# Altium PCB 无线传感狗启.PcbDoc
Units mm, origin at the board's own origin, x right, y up, seen from the top; angles counter-clockwise.
Board outline 54.33 x 73.61 mm, 2 copper layers (Top Layer, Bottom Layer); 39 components, 38 nets, 122 pads, 60 vias.
Unrouted connection lines stored in the file: 3.
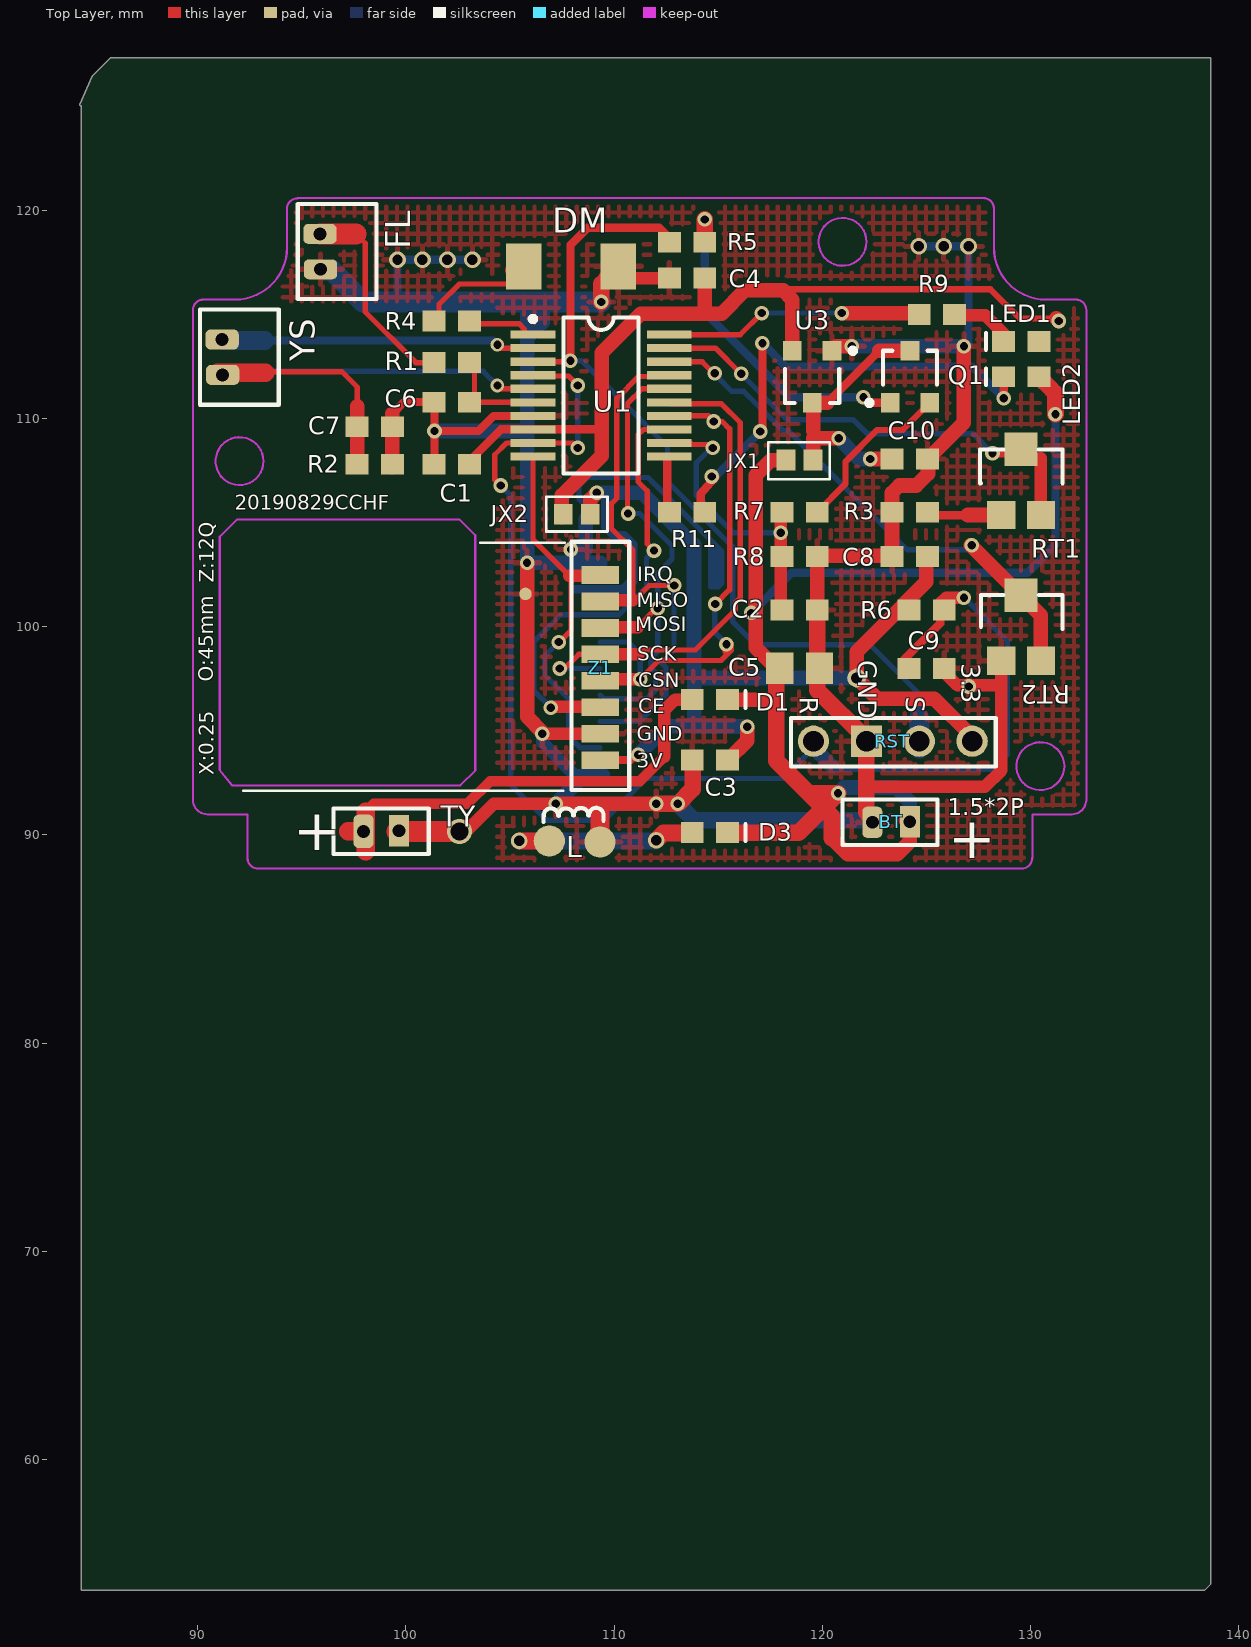
[diagram p0: Top Layer view]
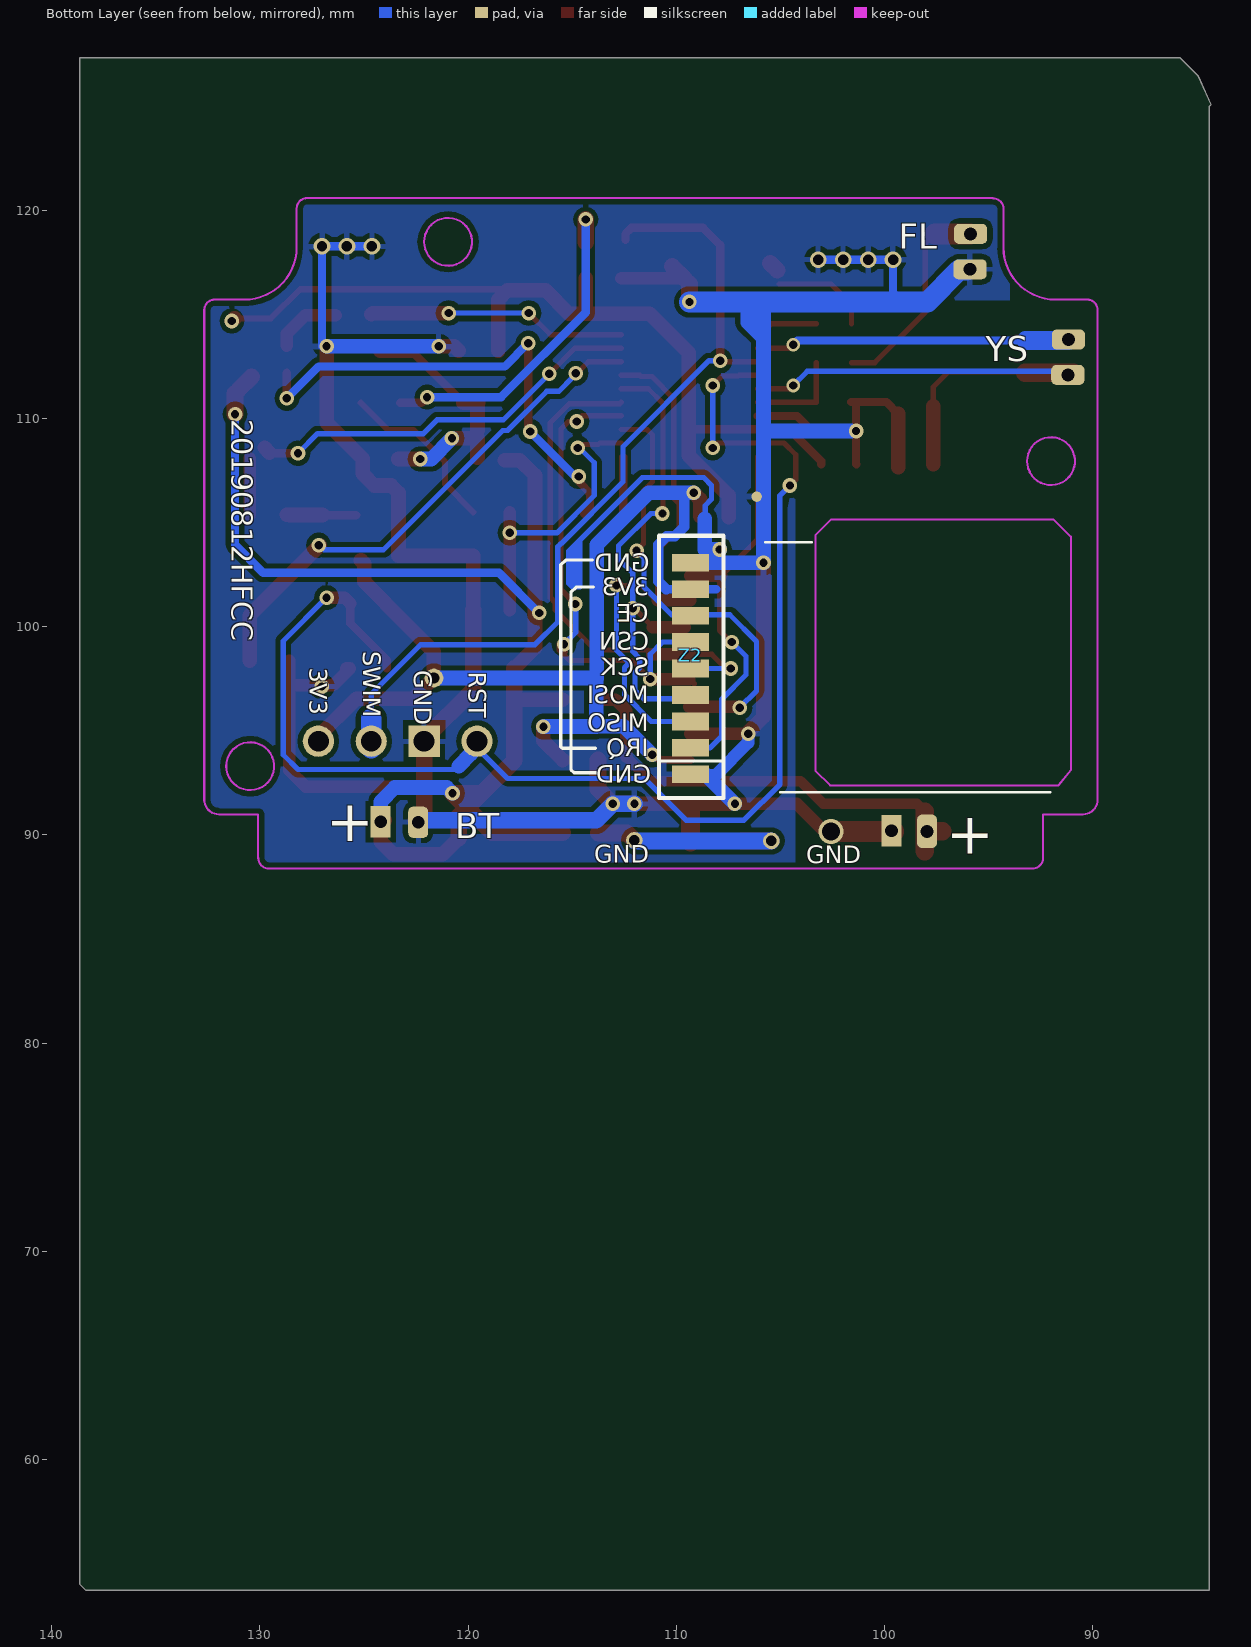
[diagram p1: Bottom Layer view, seen from below]

## Layer stack, top to bottom
Top Layer: signal copper 0.0356
Dielectric: dielectric 0.32, FR-4, Dk 4.8
Bottom Layer: signal copper 0.0356

## Board outline
84.328,125.07 84.404,124.993 84.404,53.721 138.354,53.721 138.659,54.026 138.659,127.33 85.827,127.33 84.938,126.441

## Design rules (kind name [scope] priority, off if disabled: settings)
Clearance [All] p1: gap=0.254
PolygonConnect [All] p1: connectstyle=Relief reliefconductorwidth=0.254 reliefentries=4 polygonreliefangle="90 Angle"
RoutingVias [All] p1: holewidth=0.711 width=1.27 viastyle="Through Hole" minholewidth=0.711 minwidth=1.27 maxholewidth=0.711 maxwidth=1.27
SilkscreenOverComponentPads [All] p1: minsilkscreentomaskgap=0.254
SolderMaskExpansion [All] p1: expansion=0.102
Width [All] p1: maxlimit=2 minlimit=0.254 preferedwidth=0.254 minimp=50.000000 maximp=50.000000 favimp=50.000000
27 further rules are at their usual default settings.

## Components (designator, comment, footprint, x,y, rotation, side; value= is the part's Value field where it differs from the comment)
BT "1.5*2P" MHDR1X2#1 123.932,90.635 r180 top
C1 "0.1uf" CR1608-0603 102.2,107.8 r180 top (schematic designator C6)
C2 "0.01uf" CR1608-0603 118.9,100.8 r180 top locked (schematic designator C12)
C3 "0.01uf" CR1608-0603 114.6,93.6 r0 top locked (schematic designator C10)
C4 "10uf" CR1608-0603 113.5,116.738 r180 top
C5 "22uf" CR2012-0805 118.9,98 r180 top locked (schematic designator R8)
C6 "0.01uf" CR1608-0603 102.2,110.782 r180 top locked
C7 "0.01uf" CR1608-0603 98.5,109.6 r0 top locked
C8 "0.1uf" CR1608-0603 124.2,103.378 r0 top
C9 "0.1uf" CR1608-0603 125,98 r180 top locked
C10 "10uf" CR1608-0603 124.2,108.052 r180 top (schematic designator C1)
D1 "SS14" CC1608-0603 114.6,96.5 r180 top (schematic designator D2)
D3 "SS14" CC1608-0603 114.6,90.113 r180 top (schematic designator D2)
DM "3*4*2小龟按键" HDR1X2 111.8,115.3 r0 top locked (schematic designator FW)
FL "1.5*2P" MHDR1X2#2 95.872,118.7 r270 top locked (schematic designator BT)
JX1 "0" CR1005-0402 118.9,108 r180 top locked (schematic designator C3)
JX2 "0" CR1005-0402 108.2,105.4 r180 top locked (schematic designator C3)
LED1 "LED-R" CC1608-0603 129.55,113.7 r0 top (schematic designator R1)
LED2 "LED-G" CC1608-0603 129.55,112 r0 top locked (schematic designator R1)
Q1 "S8050" SO-G3/C2.5#1 124.206,112 r0 top (schematic designator U3)
R1 "1K" CR1608-0603 102.2,112.682 r0 top locked
R2 "1M" CR1608-0603 98.5,107.8 r0 top locked
R3 "100K" CR1608-0603 124.2,105.5 r0 top
R4 "10K" CR1608-0603 102.2,114.681 r0 top locked
R5 "4.7K" CR1608-0603 113.5,118.466 r0 top
R6 "10K" CR1608-0603 125,100.8 r0 top locked (schematic designator R2)
R7 "180K" CR1608-0603 118.9,105.5 r0 top locked (schematic designator 7R)
R8 "360K" CR1608-0603 118.9,103.378 r180 top locked
R9 "1K" CR1608-0603 125.5,115 r0 top locked
R11 "470" CR1608-0603 113.5,105.5 r0 top locked (schematic designator R9)
RST "2.54*4" HDR1X4 119.572,94.5 r0 top locked (schematic designator Saoxie)
RT1 "50K" SO-G3/C2.5#2 129.54,107.264 r0 top locked (schematic designator U4)
RT2 "50K" SO-G3/C2.5#2 129.54,100.267 r0 top locked (schematic designator U4)
TY "1.5*2P" MHDR1X2#3 99.5,90.2 r180 top (schematic designator BT)
U1 "STM8L051F3P6" SSOP20 109.372,111.1 r270 top locked
U3 "XC6206 9v  6ua 250ma" SO-G3/C2.5#1 119.507,112 r180 top
YS "1.5*2P" MHDR1X2#2 91.172,113.63 r270 top locked (schematic designator BT)
Z1 "SI24R1" MHDR1X8 109.322,102.482 r270 top locked
Z2 "NRF24L01" MHDR1X8 109.322,94.182 r90 bottom locked

## Footprints (in the part's own frame and the unit in brackets; to place one, negate y for a bottom-side part, rotate by r counter-clockwise, add the part's x,y. Pads: shape width x height; smd on the part's side, far side on the other; paste and mask are expansions set on the pad)
CC1608-0603 [mm] "Chip Capacitor; Body 1.6 x 0.8 mm (LxW typ)"
  rect 1.1x1 smd: 1(-0.85,0) 2(0.85,0)
  silkscreen extent -1.7,-0.4 -1.7,0.4
CR1005-0402 [mm]
  rect 0.9x1 smd: 1(-0.65,0) 2(0.65,0)
CR1608-0603 [mm] "Chip Resistor; Body 1.6 x 0.8 mm (LxW typ)"
  rect 1.1x1 smd: 1(-0.85,0) 2(0.85,0)
CR2012-0805 [mm] "Chip Resistor; Body 2.0 x 1.3 mm (LxW typ)"
  rect 1.3x1.5 smd: 1(-0.95,0) 2(0.95,0)
HDR1X2 [mm]
  rect 1.7x2.2 smd: 1(-6.147,2.004) 2(-1.6,2.004)
HDR1X4 [mm] "Connector; Header; 4 Position"
  round 1.5 hole 1: 1(0,0) 3(5.08,0) 4(7.62,0)
  rect 1.5x1.5 hole 1: 2(2.54,0)
  silkscreen extent -1.08,-1.22 8.75,1.12
MHDR1X2#1 [mm]
  rect 0.96x1.5 hole 0.62: 1(-0.264,0)
  rrect50% 0.96x1.5 hole 0.62: 2(1.536,0.026)
  silkscreen extent -1.6,-1.07 2.97,1.12
MHDR1X2#2 [mm]
  rrect50% 0.96x1.6 hole 0.62: 1(-0.164,0) 2(1.536,0.026)
  silkscreen extent -1.6,-1.07 2.97,2.72
MHDR1X2#3 [mm]
  rect 0.96x1.5 hole 0.62: 1(-0.164,0)
  rrect50% 0.96x1.6 hole 0.62: 2(1.536,0.026)
  silkscreen extent -1.6,-1.07 2.97,1.12
MHDR1X8 [mm] "Connector; Header; 8 Position"
  rect 0.85x1.8 smd: 1(0,0) 2(1.27,0) 3(2.54,0) 4(3.81,0) 5(5.08,0) 6(6.35,0) 7(7.62,0) 8(8.89,0)
  silkscreen extent -1.6,-1.36 10.33,1.4
SO-G3/C2.5#1 [mm]
  rect 0.9x0.95 smd: 1(-0.95,-1.25) 2(0.95,-1.25) 3(0,1.25)
  silkscreen extent -2.07,-1.37 1.3,1.25
SO-G3/C2.5#2 [mm]
  rect 1.35x1.35 smd: 1(-0.95,-1.9) 2(0.95,-1.9)
  rect 1.6x1.6 smd: 3(0,1.25)
  silkscreen extent -1.96,-0.38 1.99,1.25
SSOP20 [mm] "SSOP, Plastic; 20 Leads; Body Width 5.3 mm; Pitch 0.65 mm"
  rect 0.39x2.15 smd: 1(-2.925,-3.275) 2(-2.275,-3.275) 3(-1.625,-3.275) 4(-0.975,-3.275) 5(-0.325,-3.275) 6(0.325,-3.275) 7(0.975,-3.275) 8(1.625,-3.275) 9(2.276,-3.275) 11(2.925,3.275) 13(1.625,3.275) 15(0.325,3.275) 16(-0.325,3.275) 17(-0.975,3.275) 18(-1.625,3.275) 19(-2.275,3.275) 20(-2.925,3.275)
  rect 0.395x2.15 smd: 10(2.925,-3.275) 12(2.276,3.275) 14(0.975,3.275)
  silkscreen extent -3.8,-3.4 3.75,1.8

## Part data
C1 C2 C5 C6 C8 C10 LED1 LED2 R2 R6 R7 R8: library part Res3, "Resistor"
C3 C4 C7 C9: library part "Cap Semi", "Capacitor (Semiconductor SIM Model)"
D1 D3 R1 R4: library part "Diode 1N4007", "1 Amp General Purpose Rectifier"
JX1 JX2: library part "Cap Semi", "Capacitor (Semiconductor SIM"
Q1 RT1 RT2 U3: library part QNPN, "NPN Bi"
R3 R5 R9 R11: library part "Cap Pol3"
RST: library part "Header 4", "Header, 4-Pin"
U1: library part ST6208CN6, "8-Bit ROM MCU with A/D Converter, Two Timers, Oscillator Safeguard and Safe Reset, 20-Pin SSOP, Industrial"

## Free pads (board coordinates)
  rect 1.8x0.85 smd far side: 0(109.322,92.912)
  round 0.8 hole 0.5: 1(105.435,89.713) 1(112.014,89.738)
  round 0.9 hole 0.55: 1(121.641,97.536)
  round 0.6 smd: 3(105.74,101.575)
  round 1.5 smd: 3(106.883,89.713) 3(109.322,89.662)
  round 0.5 smd far side: 4(106.147,106.248)

## Via types
v1: diameter 0.7, hole 0.4, Top Layer to Bottom Layer, 50 vias
v2: diameter 0.8, hole 0.5, Top Layer to Bottom Layer, 7 vias
v3: diameter 0.65, hole 0.4, Top Layer to Bottom Layer, 2 vias
v4: diameter 1.2, hole 0.86, Top Layer to Bottom Layer, 1 vias

## Nets (pads, with @x,y where several pads share a name; then routed paths per layer and width w, separated by ;. In a path a pad name is that pad's centre, name@x,y a point inside that pad or via, vN(x,y) a via of type N, cw(c..) or ccw(c..) an arc to the next point about the centre after c; other vN are vias at no path point)
3V3: C1.1 C3.2 C4.1 C8.2 JX2.1 JX2.2 LED1.2 pad.1@121.641,97.536 R6.1 RST.4 U1.8 U3.2 Z1.8 Z2.7 | length 102.7
  Top Layer w0.3: 117.983,116.205 128.067,116.205 129.468,114.804 v1@131.22,114.804
  Top Layer w0.4: C1.1 103.05,107.961 104.564,109.475 U1.8 109.398,109.475 109.474,109.475 ; U1.8@106.096,109.473 U1.8 ; Z1.8@109.322,93.599 110.795,93.599 111.049,93.853 v1(111.15,93.853)
  Top Layer w0.7: JX2.2@107.493,105.247 107.493,106.299 109.398,108.204 109.398,109.475 109.398,113.157 111.277,115.037 114.351,115.037 115.164,115.037 116.281,116.154 118.11,116.154 118.557,115.707 U3.2 ; JX2.1@108.85,105.308 108.85,106.107 v1(109.169,106.426) ; 114.35,115.037 C4.1 ; C3.2 116.383,94.533 v1(116.383,95.199) ; C8.2@125.146,103.188 124.993,103.036 124.993,102.159 123.952,101.117 123.952,101.102 121.641,98.791 121.641,97.536 122.631,96.545 125.374,96.545 127.192,94.728 RST.4@127.192,94.182 ; v1@131.22,114.804 v1(131.343,114.681)
  Bottom Layer w0.4: 108.078,101.802 110.491,101.802
  Bottom Layer w0.5: 109.626,106.451 109.626,104.8 110.084,104.343 110.465,104.343 110.871,103.937 110.871,102.182 110.491,101.802
  Bottom Layer w0.7: v1(109.169,106.426) 111.336,106.426 113.832,103.93 113.832,97.496 ; v1(111.15,93.853) 112.522,95.225 v1@116.357,95.225 ; v1(116.383,95.199) 113.843,95.199 113.843,97.536 pad.1@121.641,97.536
4.2V: 
5V: D1.2 TY.2 | length 21.9
  Top Layer w0.5: 98.069,91.11 98.45,91.491 102.946,91.491 104.038,92.583 111.227,92.583 112.395,93.751
  Top Layer w0.6: 112.395,93.751 112.395,95.97 112.925,96.5 D1.2
  Top Layer w0.9: 97.231,90.174 TY.2@98.064,90.174 ; 98.069,89.23 98.069,91.11
BT: BT.1 C5.2 C10.2 D1.1 D3.1 JX1.1 JX1.2 LED2.2 Q1.3 U3.3 | length 77.1
  Top Layer w0.4: 117.78,97.2 117.95,97.2 ; 120.224,110.75 122.724,113.25
  Top Layer w0.5: 117.768,96 117.78,96.012
  Top Layer w0.7: D1.1 117.68,96.5 ; C5.2@117.78,97.993 116.789,98.984 116.789,107.264 117.525,108 JX1.2 ; JX1.1@119.55,108.127 119.55,109.042 v1(120.777,109.042) ; 119.55,109.423 119.55,110.707 U3.3 120.224,110.75 ; 120.447,89.84 121.209,89.078 123.596,89.078 124.196,89.677 124.196,90.5 BT.1@123.996,90.7 ; v1(122.301,108.052) C10.2 ; 122.724,113.25 Q1.3
  Top Layer w0.8: D3.1 118.866,90.113 120.053,91.3 ; C5.2@117.78,97.993 117.78,97.2 117.78,96.012 117.78,93.574 119.355,91.999 ; 120.447,89.84 120.447,90.907 120.053,91.3 ; LED2.2 131.013,111.387 131.013,111.379 131.191,111.201 v1(131.191,110.2) ; 119.355,91.999 120.053,91.3 ; 119.355,91.999 v1(120.752,91.999) 120.053,91.3
  Bottom Layer w0.4: v1(116.586,100.66) 118.516,102.591 129.845,102.591 131.191,103.937 v1@131.191,110.007
  Bottom Layer w0.7: v1(120.752,91.999) 121.031,92.278 123.52,92.278 124.196,91.602 BT.1 ; v1(120.777,109.042) 121.768,108.052 v1@122.174,108.052
CE: U1.13 Z1.6 Z2.6 | length 21.7
  Top Layer w0.254: v1(111.912,103.657) 111.582,103.988 111.582,106.528 111.15,106.959 111.15,109.22 111.405,109.475 U1.13
  Top Layer w0.6: v1@107.01,96.164 Z1.6@109.372,96.164
  Bottom Layer w0.254: v1(106.959,96.114) 106.152,96.921 106.152,99.294 107.434,100.576 110.228,100.576 111.557,101.905 111.557,103.302 v1(111.912,103.657)
CSN: U1.14 Z1.5 Z2.5 | length 25.3
  Top Layer w0.254: Z1.5@109.144,97.257 Z1.5@109.372,97.485 ; v1(111.252,97.485) 112.141,98.374 115.138,98.374 115.621,98.857 v1@115.621,99.187 ; U1.14 114.513,110.124 v1(114.783,109.855) 115.189,109.855 115.545,109.499 115.545,101.778 v1(114.859,101.092) ; 115.322,98.781 115.322,99.091 v1(115.392,99.162)
  Top Layer w0.6: Z1.5@109.372,97.485 v1(111.252,97.485)
  Bottom Layer w0.254: Z2.5 110.669,99.262 111.252,98.679 v1(111.252,97.485) ; v1(114.859,101.092) 114.833,101.067 114.833,99.72 v1(115.392,99.162)
DM: DM.1 R4.1 | length 5.3
  Top Layer w0.254: R4.1@101.588,114.554 101.588,115.482 102.565,116.459 DM.1@105.054,116.459
  Top Layer w0.8: DM.1@105.156,117.12 DM.1@105.486,117.45
DM-D: R4.2 U1.1 | length 3.2
  Top Layer w0.254: R4.2@103.288,114.554 105.427,114.554 105.681,114.3 105.681,114.025 U1.1
DYKG: 
DYKZ: 
FL: C6.1 R1.2 U1.6 | length 4.7
  Top Layer w0.254: R1.2@103.288,112.682 103.288,110.774 U1.6
FL-IN: FL.1 R1.1 | length 10.1
  Top Layer w0.254: 97.695,118.764 98.044,118.415 98.044,115.113 100.475,112.682 R1.1@101.588,112.682
  Top Layer w1: FL.1 97.595,118.864
FL-RT: RT1.2 RT1.3 U1.19 | length 22.4
  Top Layer w0.254: U1.19@112.662,113.36 U1.19 114.87,113.375 v1(116.103,112.141)
  Top Layer w0.4: v1(128.168,108.331) 129.515,108.331 RT1.3@129.769,108.585
  Top Layer w0.6: RT1.2 130.49,108.092
  Top Layer w0.7: RT1.3@129.54,108.356 RT1.3@129.769,108.585
  Bottom Layer w0.254: v1(116.103,112.141) 118.313,109.931 121.488,109.931 122.149,109.271 127.229,109.271 v1(128.168,108.331)
GND: BT.2 C1.2 C2.1 C3.1 C4.2 C5.1 C6.2 C7.2 C8.1 C9.1 C10.1 DM.2 FL.2 pad.0 pad.3@105.74,101.575 pad.3@109.322,89.662 pad.4 R2.2 R3.1 R8.1 RST.2 RT2.1 TY.1 U1.7 U3.1 Z1.7 Z2.8 | length 195.2
  Top Layer w0.254: DM.2@109.372,116.476 DM.2@109.634,116.738
  Top Layer w0.39: 99.35,110.221 99.911,110.782 C6.2 C6.2@101.371,110.782 ; C1.2 101.371,107.821 v1(101.371,109.398) C6.2@101.371,110.782 ; v1@101.6,109.398 103.48,109.398 104.206,110.125 U1.7 ; C6.2@101.6,110.782 C6.2@101.371,110.782 ; 128.59,97.18 RT2.1
  Top Layer w0.6: v4(102.565,90.17) 102.895,90.17 104.216,91.491 109.398,91.491 109.245,91.338 ; v1@106.553,94.931 106.622,94.862 Z1.7 ; DM.2@109.634,116.738 C4.2 ; 122.352,92.304 127.787,92.304 128.59,93.106 RT2.1 ; C9.1@125.857,98 125.672,98 126.492,97.18 128.59,97.18
  Top Layer w0.7: R2.2@99.35,107.66 99.35,110.221 ; v1(105.816,103.072) 105.816,95.668 v1@106.553,94.931 ; v1(107.188,91.491) 109.398,91.491 v1(112.014,91.491) ; C2.1 R8.1 ; R8.1@119.75,103.415 123.342,103.415 123.342,106.426 123.698,106.782 124.511,106.782 125.07,107.34 125.07,108.071 126.797,109.798 v1(126.797,113.462) ; U3.1 120.669,113.462 v1(121.412,113.462)
  Top Layer w0.8: v1(109.372,115.595) DM.2@109.372,116.476 ; DM.2@109.634,116.738 DM.2 ; v1(112.014,91.491) v1(113.055,91.491) 113.767,92.202 C3.1@113.767,93.6 ; C2.1 119.75,96.963 122.112,94.601 122.112,91.088 BT.2@122.5,90.7
  Top Layer w0.9: pad.3@109.322,89.662 109.322,91.262
  Top Layer w1: TY.1@99.564,90.17 v4(102.565,90.17)
  Bottom Layer w0.254: 108.61,105.207 108.61,105.824 108.311,106.123 108.311,106.787 108.687,107.163 111.633,107.163 114.63,104.165 ; 115.138,102.286 115.164,102.311 ; 114.63,104.165 114.897,103.899 ; 114.63,104.165 114.63,101.905 114.986,101.905 115.164,102.083 115.164,102.311 ; 114.897,102.171 115.1,102.375 ; 114.897,102.171 114.808,102.083 114.808,103.683 114.656,103.835 114.656,101.93 114.833,101.93 114.897,101.994 114.897,102.171 ; 114.897,102.171 114.897,103.899 ; 114.897,103.899 115.164,103.632 ; 115.1,102.375 115.164,102.311 ; 115.1,102.375 114.986,102.489 114.986,103.454 115.164,103.632 ; 115.1,102.375 115.164,102.438 ; 115.164,102.311 115.164,102.438 ; 115.164,102.438 115.164,103.632
  Bottom Layer w0.4: 99.517,115.976 99.593,116.053 v2(99.593,117.627) v2(100.793,117.627) v2(101.993,117.627) v2(103.193,117.627) ; v2(124.619,118.262) v2(125.819,118.262) v2(127.019,118.262) v1@127.019,113.462
  Bottom Layer w0.5: FL.2@95.898,117.264 FL.2@96.04,117.122 ; TY.1@99.636,89.916 TY.1@99.636,89.941 ; 105.816,113.741 106.68,114.605 106.68,115.748 ; 105.816,115.265 cw(c105.51,114.959) 105.943,114.959 ; 105.943,115.265 105.943,114.3 106.375,114.732 106.375,115.341 ; 108.078,92.912 108.939,92.912 pad.0 pad.0@109.546,92.912
  Bottom Layer w0.6: v1(106.553,94.862) 106.553,94.437 108.078,92.912 ; pad.0@108.609,92.912 pad.0@108.939,92.912
  Bottom Layer w0.7: v1@101.6,109.398 105.791,109.398 ; 105.816,115.265 105.816,113.741 v1(105.816,103.072) Z2.8 ; v1(107.188,91.491) pad.0@108.609,92.912 ; v1(107.925,103.708) 108.636,103.708 108.636,105.181 ; v1(121.412,113.462) v1(126.797,113.462)
  Bottom Layer w0.8: v1(112.014,91.491) v1(113.055,91.491) 113.846,90.7 BT.2@122.496,90.7
  Bottom Layer w1: FL.2@96.04,117.122 96.419,117.122 97.946,115.595 v1(109.372,115.595)
  other v1: 127.025,97.13
IRQ: U1.10 Z1.1 Z2.1 | length 18.5
  Top Layer w0.254: U1.10 106.097,104.189 107.848,102.438 ; v1@107.353,99.251 107.925,99.822 107.925,102.159 108.204,102.438
  Top Layer w0.6: 107.848,102.438 Z1.1@109.322,102.438
  Bottom Layer w0.254: v1(107.34,99.263) 106.66,98.583 106.66,97.69 107.817,96.533 107.817,94.748 108.383,94.182 Z2.1
L+: 
L-: 
L-R-R: LED1.1 R9.2 | length 3.3
  Top Layer w0.6: R9.2@126.35,114.96 127.813,114.96 128.7,114.073 LED1.1@128.7,113.5
LED2: R11.1 U1.11 | length 2.6
  Top Layer w0.4: R11.1@112.547,105.551 U1.11@112.547,108.153
LED2-R: LED2.1 R11.2 | length 23.7
  Top Layer w0.4: R11.2@114.427,105.422 114.15,105.699 114.15,106.377 114.794,107.114 v1@114.859,107.188 ; v1@117.119,109.271 v1(117.018,109.372) 117.119,109.474 v1(117.119,113.614) ; LED2.1@128.7,112.2 128.702,112.198 v1(128.702,110.973)
  Bottom Layer w0.4: v1(114.681,107.213) 114.859,107.213 v1(117.018,109.372) ; v1(117.119,113.614) 118.237,112.497 127.178,112.497 v1(128.702,110.973)
MISO: U1.17 Z1.2 Z2.2 | length 26.4
  Top Layer w0.254: 110.896,101.27 110.896,103.683 109.861,104.719 109.861,105.898 110.129,106.166 110.129,110.967 111.175,112.014 111.699,112.014 111.76,112.075 U1.17 ; 110.973,101.27 111.684,101.981 v1(112.878,101.981)
  Top Layer w0.6: Z1.2@109.322,101.27 110.896,101.27
  Bottom Layer w0.254: Z2.2 111.208,95.452 112.491,96.735 112.491,98.036 112.278,98.249 112.278,98.267 112.878,98.867 v1(112.878,101.981) v1@112.725,101.981
MOSI: U1.16 Z1.3 Z2.3 | length 23.5
  Top Layer w0.254: v1@110.642,105.435 110.642,110.719 111.348,111.425 U1.16 ; 111.125,99.974 v1@112.065,100.914
  Top Layer w0.6: Z1.3@109.601,99.974 111.125,99.974
  Bottom Layer w0.254: Z2.3 109.498,96.545 111.583,96.545 111.983,96.946 111.983,97.802 111.776,98.009 111.787,98.02 111.787,98.022 111.77,98.039 111.77,98.182 111.76,98.192 111.76,98.475 112.09,98.806 112.09,102.565 112.776,103.251 112.776,103.886 111.227,105.435 v1(110.668,105.435)
  other v1: 112.09,100.889
PB7: C2.2 R7.1 R8.2 U1.12 | length 14.6
  Top Layer w0.254: U1.12 113.68,108.824 113.754,108.75 v1@114.808,108.75 ; v1@114.808,108.585 v1@114.808,108.737
  Top Layer w0.6: C2.2@117.997,100.8 R7.1@117.997,105.5
  Bottom Layer w0.254: v1@114.808,108.737 113.944,107.874 113.944,106.299 115.735,104.508 v1(117.996,104.508)
  other v1: 114.732,108.585
Q1-B: Q1.1 R5.2 | length 16.3
  Top Layer w0.254: R5.2 R5.2
  Top Layer w0.4: v1(121.971,111.023) 122.244,110.75 Q1.1
  Top Layer w0.8: R5.2 v1(114.351,119.558)
  Bottom Layer w0.4: v1(114.351,119.558) 114.351,115.087 118.415,111.023 v1(121.971,111.023)
Q1-E: Q1.2 R7.2 | length 8.2
  Top Layer w0.3: R7.2 121.107,106.857 121.107,107.924 122.632,109.449 123.855,109.449 Q1.2
Q4-B: 
R1R: R3.2 RT1.1 | length 3.3
  Top Layer w0.4: R3.2@125.374,105.359 126.975,105.359 126.98,105.364
  Top Layer w0.7: 126.98,105.364 RT1.1 ; RT1.1@128.572,105.382 RT1.1@128.704,105.382
R5: 
RST: C9.2 R6.2 RST.1 U1.4 U1.9 | length 66.2
  Top Layer w0.254: v1(104.546,106.782) 104.267,107.061 104.267,108.255 104.836,108.824 U1.9 108.016,108.824 v1(108.255,108.585) ; U1.4 106.985,112.075 107.02,112.039 107.798,112.039 v1(108.255,111.582)
  Top Layer w0.4: C9.2@123.901,98 123.901,98.4 125.654,100.152 R6.2@125.654,101.104
  Top Layer w0.6: R6.2@125.654,101.104 125.947,101.397 v1(126.797,101.397)
  Bottom Layer w0.254: v1(104.546,106.782) 105.029,106.299 105.029,92.431 106.75,90.71 109.531,90.71 111.531,92.71 118.1,92.71 119.572,94.182 RST.1@119.865,93.889 ; v1(108.255,108.585) v1(108.255,111.582) ; 120.452,93.302 120.612,93.142 128.168,93.142 128.877,93.85 128.877,99.317 v1(126.797,101.397) v1@126.594,101.397
  Bottom Layer w0.7: RST.1@119.865,93.889 120.452,93.302
RT2: RT2.2 RT2.3 U1.18 | length 25.3
  Top Layer w0.254: U1.18 114.224,112.725 v1@114.96,111.989 ; RT2.3@129.484,101.573 RT2.3
  Top Layer w0.7: v1@127.127,103.911 130.49,100.548 RT2.2
  Bottom Layer w0.254: v1@114.96,111.989 115.646,111.303 116.223,111.303 118.103,109.423 118.339,109.423 124.073,103.688 126.904,103.688 v1@127.127,103.911
  other v1: 127.178,103.911 114.833,112.166
SCK: U1.15 Z1.4 Z2.4 | length 24.4
  Top Layer w0.254: v1@107.493,97.866 108.299,98.672 Z1.4 ; 111.169,98.672 111.379,98.882 113.894,98.882 115.824,100.813 115.824,101.168 116.053,101.397 116.053,109.804 115.154,110.703 112.719,110.703 U1.15
  Top Layer w0.6: Z1.4 111.169,98.672
  Bottom Layer w0.254: v1@107.366,97.992 Z2.4
  other v1: 107.391,97.993
SWIM/BT: R5.1 RST.3 U1.3 | length 42
  Top Layer w0.254: U1.3 107.721,112.725 107.772,112.776 107.798,112.751 107.874,112.751 v1(107.899,112.776)
  Top Layer w0.4: v1(107.899,112.776) 107.899,118.339 108.712,119.151 112.166,119.151 112.446,118.872 R5.1@112.446,118.567
  Bottom Layer w0.254: 124.652,95.582 124.652,96.76 122.276,99.136 116.789,99.136 115.697,100.228 115.697,103.835 115.532,104 115.525,104 112.566,106.959 112.566,108.643 108.433,112.776 v1(107.899,112.776) ; v1(107.899,112.776) 107.772,112.776 107.798,112.751 107.874,112.751 v1(107.899,112.776)
  Bottom Layer w1: RST.3@124.652,94.182 124.652,95.582
T-LED: R9.1 U1.20 | length 12.5
  Top Layer w0.254: U1.20 116.057,114.025 v1(117.094,115.062)
  Top Layer w0.7: v1(120.929,115.062) 124.588,115.062 R9.1
  Bottom Layer w0.254: v1(117.094,115.062) v1@120.98,115.062
TEMP: 
WXCD: D3.2 pad.1@105.435,89.713 pad.1@112.014,89.738 pad.3@106.883,89.713 | length 9.9
  Top Layer w0.8: pad.1@105.435,89.713 pad.3@106.883,89.713 ; pad.1@112.014,89.738 112.37,90.094 D3.2@113.75,90.094
  Bottom Layer w0.8: pad.1@105.435,89.713 pad.1@111.989,89.713
YS: C7.1 R2.1 U1.5 YS.2 | length 25.7
  Top Layer w0.254: 93.497,112.243 96.926,112.243 97.663,111.506 97.663,110.58 ; v3(104.394,111.582) 104.552,111.425 U1.5
  Top Layer w0.7: R2.1@97.663,107.8 97.663,108.727 97.663,110.58
  Top Layer w0.9: YS.2@90.947,112.192 93.243,112.192
  Bottom Layer w0.254: YS.2@91.172,112.268 103.708,112.268 v3(104.394,111.582)
YSD: U1.2 YS.1 | length 15.1
  Top Layer w0.254: v3(104.394,113.544) 104.563,113.374 U1.2
  Bottom Layer w0.4: 93.218,113.741 101.073,113.746 104.191,113.746 v3(104.394,113.544)
  Bottom Layer w0.9: YS.1@91.172,113.746 93.218,113.741
ZL+: 

## Polygon pours and split planes (outlines as drawn)
GND on Bottom Layer "Top Layer-No Net" (solid, remove dead copper, pour order 3): 127.197,120.591 127.253,120.536 127.908,120.536 127.908,120.486 127.934,120.461 127.972,120.423 127.972,120.096 127.972,117.808 128.01,117.77 128.518,117.268 128.518,116.589 128.823,116.589 129.686,115.734 129.854,115.568 130.472,115.568 131.906,115.568 131.972,115.633 132.038,115.568 132.212,115.568 132.343,115.568 132.455,115.457 132.612,115.302 132.612,115.172 132.612,92.096 132.633,92.075 132.531,91.975 132.531,91.271 132.229,91.271 132.05,91.094 130.423,91.094 130.423,89.015 130.321,88.915 130.321,88.681 130.198,88.681 130.036,88.52 127.289,88.52 127.121,88.354 126.968,88.505 104.293,88.505 104.293,115.454 104.388,115.548 104.25,115.684 93.989,115.684 93.989,119.718 94.028,119.757 93.872,119.91 93.872,120.36 94.305,120.36 94.528,120.58 94.539,120.591 127.472,120.591
GND on Top Layer "Top Layer-No Net" (hatched 90Degree grid 0.508 track 0.203, remove dead copper, pour order 4): 127.229,120.574 127.284,120.518 127.938,120.518 127.938,120.467 127.964,120.442 128.002,120.404 128.002,120.074 128.002,117.762 128.04,117.724 128.547,117.216 128.547,116.53 128.851,116.53 129.713,115.667 129.88,115.499 130.497,115.499 131.928,115.499 131.994,115.565 132.06,115.499 132.233,115.499 132.365,115.499 132.476,115.387 132.633,115.23 132.633,115.099 132.633,91.786 132.653,91.765 132.552,91.664 132.552,90.952 132.25,90.952 132.072,90.774 130.448,90.774 130.448,88.674 130.347,88.572 130.347,88.336 130.224,88.336 130.062,88.174 127.32,88.174 127.153,88.006 127,88.158 104.37,88.158 104.37,115.384 104.465,115.478 104.327,115.616 94.086,115.616 94.086,119.692 94.125,119.731 93.97,119.886 93.97,120.34 94.402,120.34 94.624,120.563 94.635,120.574 127.503,120.574

## Keep-outs
Keep-Out Layer:
  circle w0.1: c130.466,93.302 r1.15
  circle w0.1: c120.966,118.482 r1.15
  circle w0.1: c92.01,107.95 r1.15
  lines w0.1: 90.472,90.982 92.396,90.982 ; 90.472,90.99 cw(c90.472,91.69) 89.772,91.69 89.772,115.207 cw(c90.272,115.207) 90.272,115.707 91.792,115.707 ccw(c91.792,118.207) 94.292,118.207 ; 92.396,88.882 92.396,90.983 ; 92.397,88.882 ccw(c92.897,88.882) 92.897,88.382 127.574,88.382 129.572,88.382 ccw(c129.572,88.882) 130.072,88.882 ; 94.288,118.207 94.288,120.071 cw(c94.788,120.071) 94.788,120.571 ; 94.797,120.582 127.732,120.582 cw(c127.732,120.082) 128.232,120.082 ; 128.237,120.082 128.237,118.207 ccw(c130.737,118.207) 130.737,115.707 ; 130.083,88.882 130.083,90.982 131.972,90.982 ; 130.732,115.707 132.172,115.707 cw(c132.172,115.207) 132.672,115.207 132.672,91.644 ; 131.972,90.99 ccw(c131.972,91.69) 132.672,91.69 ; 91.059,93.117 91.648,92.38 102.616,92.38 103.327,93.091 103.327,104.394 102.565,105.156 91.897,105.156 91.059,104.318 91.059,93.117

## Silkscreen, mask and mechanical layers (free items; w line width, h text height)
Top Overlay:
  lines w0.127: 92.202,92.126 107.544,92.126 ; 103.581,104.038 107.62,104.038 ; 106.731,104.572 106.731,106.248 109.677,106.248 109.677,104.572 106.731,104.572 ; 117.399,107.086 117.399,108.864 120.345,108.864 120.345,107.086 117.399,107.086
  lines w0.2: 106.611,90.63 106.611,90.98 ; 106.615,90.91 cw(c106.962,90.93) 107.311,90.93 ; 107.34,90.91 cw(c107.687,90.93) 108.036,90.93 ; 108.061,90.93 cw(c108.408,90.949) 108.756,90.949 ; 108.79,90.935 cw(c109.137,90.955) 109.486,90.955 109.486,90.678 ; 127.61,100 127.61,101.517 128.016,101.517
  text "20190829CCHF" at 91.77,105.613 h0.7
  text "IRQ" at 111.1,102.184 h0.7
  text "Z:12Q" at 90.78,102.108 h0.7 r90
  text "MISO" at 111.074,100.94 h0.7
  text "MOSI" at 111.023,99.771 h0.7
  text "GND" at 121.717,98.4 h0.9 r270
  text "SCK" at 111.1,98.374 h0.7
  text "3.3" at 126.695,98.247 h0.9 r270
  text "O:45mm" at 90.754,97.358 h0.7 r90
  text "CSN" at 111.15,97.104 h0.7
  text "R" at 118.923,96.647 h0.9 r270
  text "S" at 124.028,96.647 h0.9 r270
  text "CE" at 111.15,95.834 h0.7
  text "GND" at 111.074,94.513 h0.7
  text "3V" at 111.074,93.218 h0.7
  text "X:0.25" at 90.78,92.862 h0.7 r90
  text "+" at 94.59,89.256 h2
  text "L" at 107.696,88.925 h1
  text "+" at 126.035,88.875 h2
Bottom Overlay:
  lines w0.127: 92.05,92.05 105.004,92.05 ; 103.505,104.064 105.74,104.064
  lines w0.16: 107.772,93.548 110.82,93.548 ; 113.843,92.989 114.91,92.989 115.062,93.142 115.062,101.651 114.808,101.905 113.995,101.905 ; 113.894,94.158 115.468,94.158 115.545,94.234 115.545,102.972 115.316,103.2 114.046,103.2
  text "FL" at 99.314,118.161 h1.2
  text "YS" at 95.148,112.751 h1.2
  text "20190812HFCC" at 131.343,109.957 h1 r90
  text "GND" at 111.277,102.667 h0.85
  text "3V3" at 111.303,101.498 h0.85
  text "CE" at 111.328,100.228 h0.85
  text "CSN" at 111.303,98.882 h0.85
  text "SWIM" at 125.044,98.831 h0.85 r90
  text "3V3" at 127.61,98.019 h0.85 r90
  text "GND" at 122.58,97.917 h0.85 r90
  text "RST" at 119.964,97.841 h0.85 r90
  text "SCK" at 111.303,97.663 h0.85
  text "MOSI" at 111.328,96.317 h0.85
  text "MISO" at 111.328,94.971 h0.85
  text "IRQ" at 111.328,93.777 h0.85
  text "GND" at 111.201,92.507 h0.85
  text "+" at 126.822,89.687 h2
  text "+" at 97.028,89.103 h2
  text "GND" at 113.944,88.671 h0.85
  text "GND" at 103.759,88.646 h0.85